# Altium PCB main_board.PcbDoc
Units mm, origin at the board's own origin, x right, y up, seen from the top; angles counter-clockwise.
Board outline 100.1 x 119.9 mm, 2 copper layers (Top Layer, Top, Bottom Layer, Bottom); 70 components, 122 nets, 500 pads, 0 vias.
Unrouted connection lines stored in the file: 189.
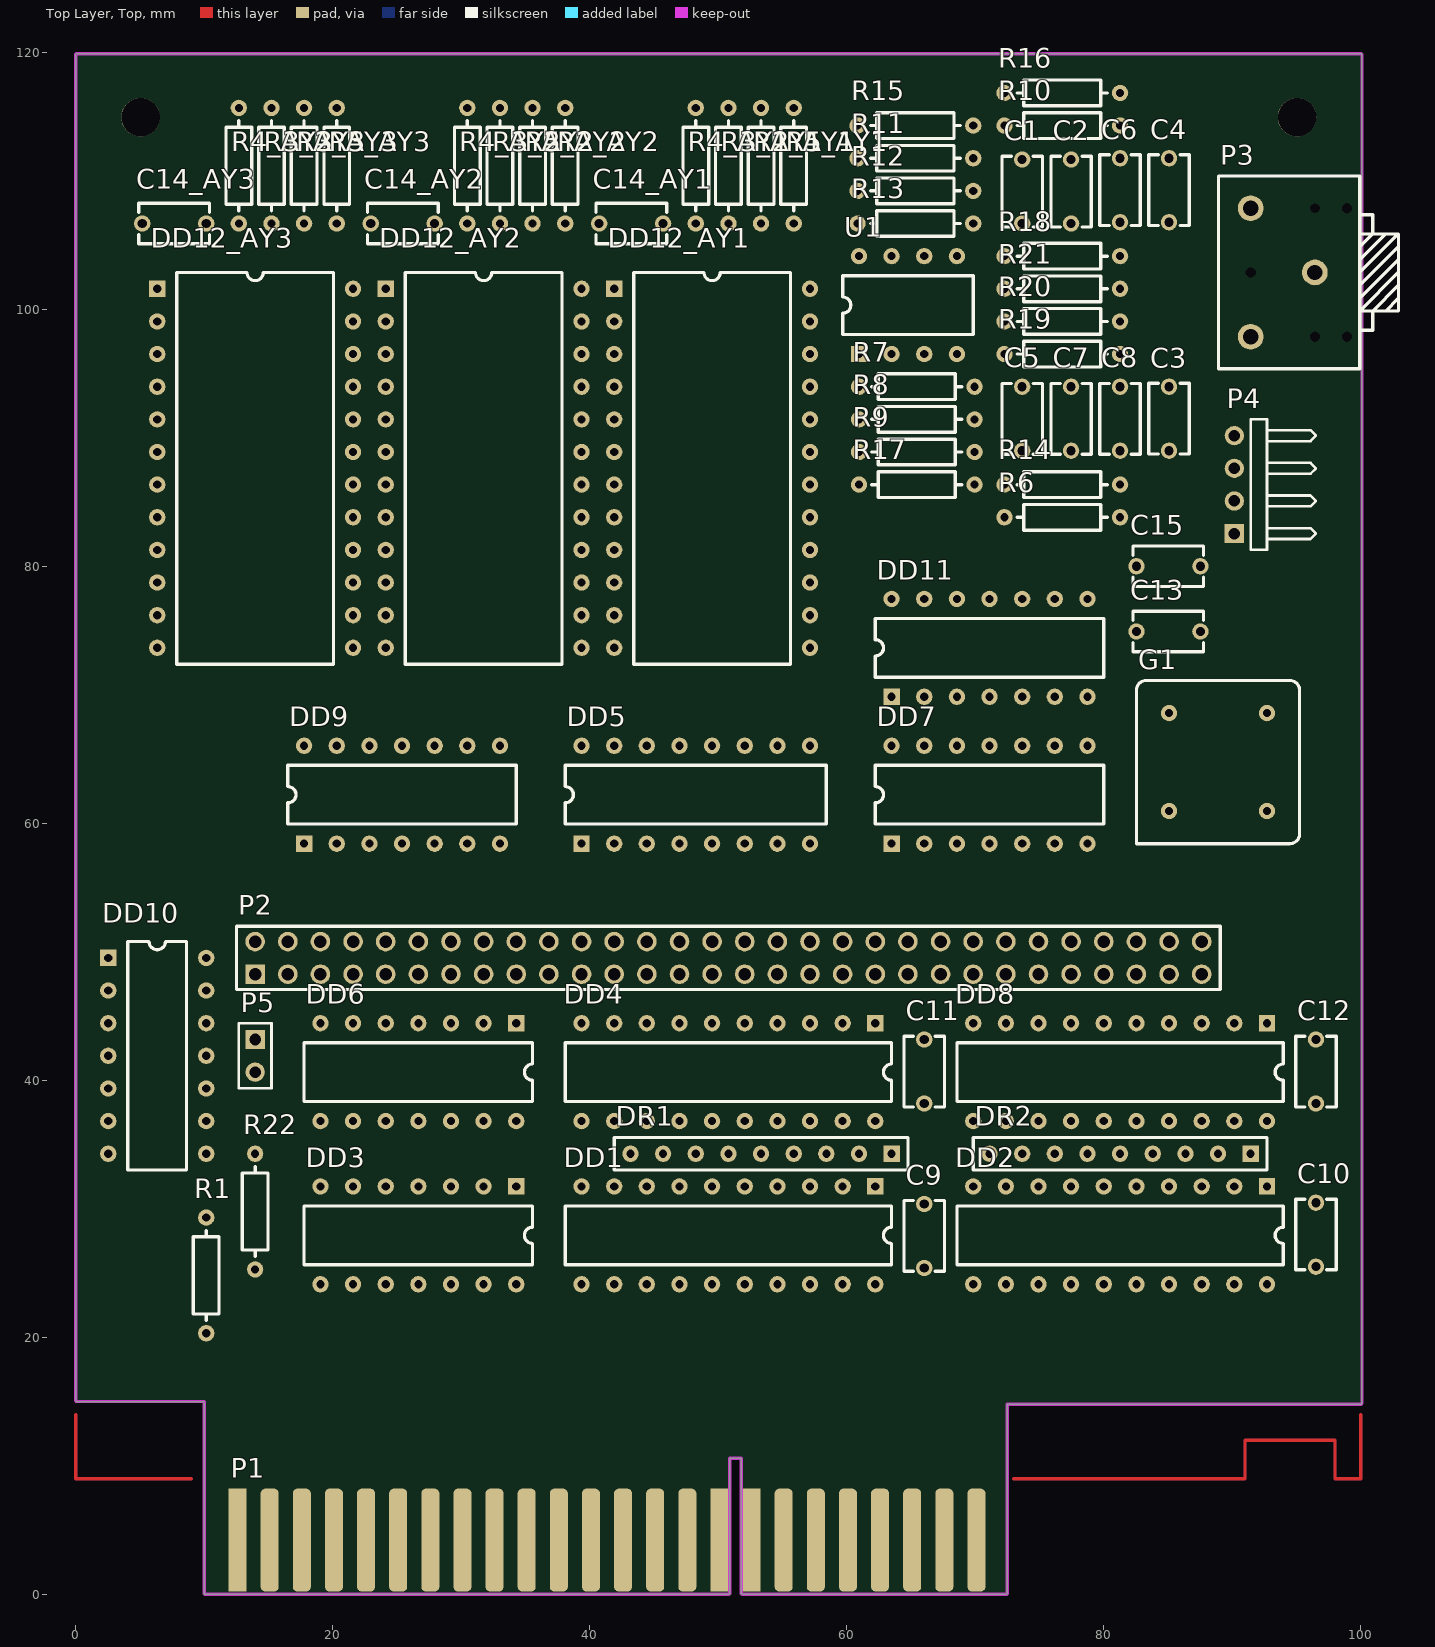
[diagram p0: Top Layer, Top view]
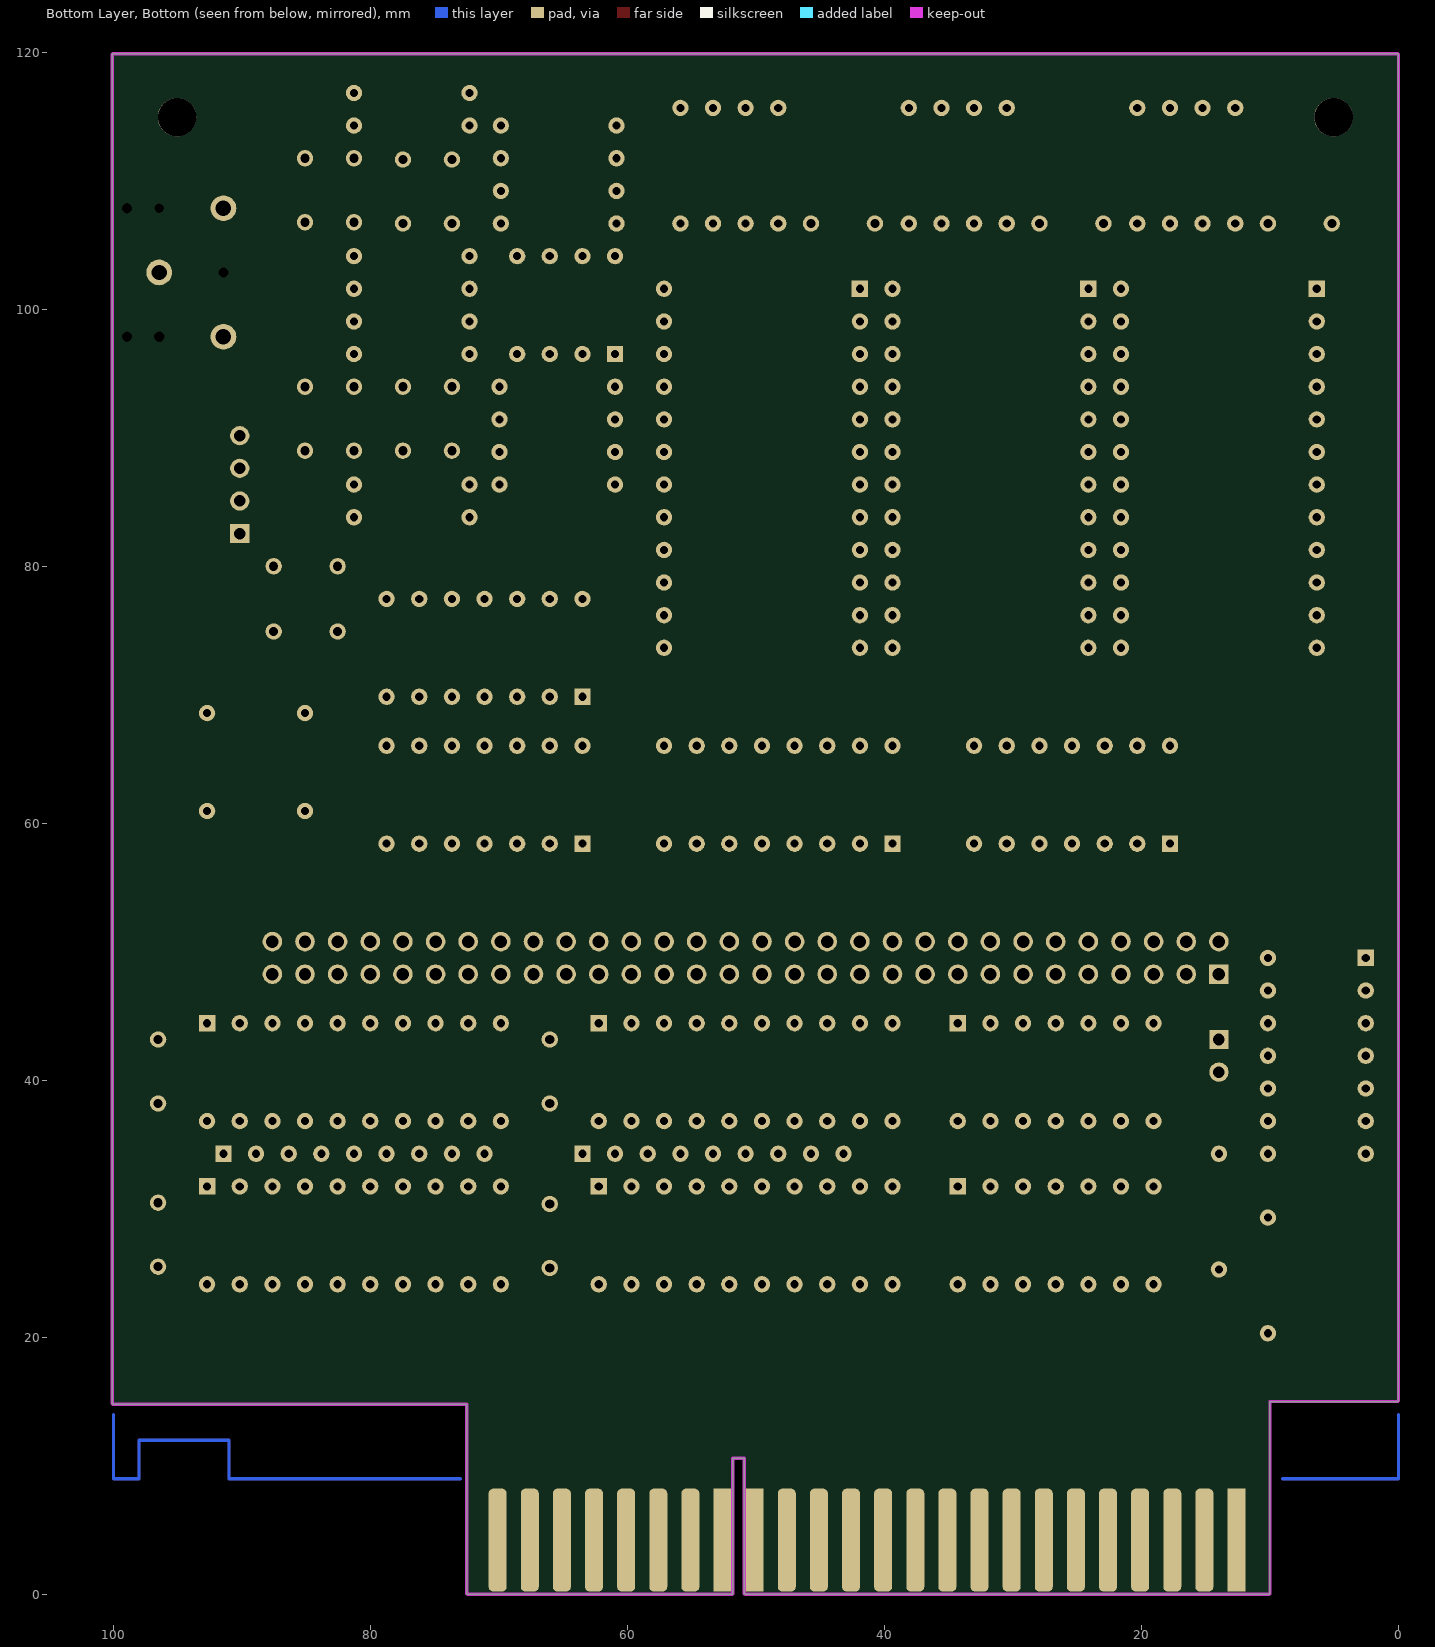
[diagram p1: Bottom Layer, Bottom view, seen from below]

## Layer stack, top to bottom
Top Solder, Top Mask: solder mask 0.0102, Solder Resist, Dk 3.5
Top Layer, Top: signal copper 0.0356
Dielectric 1: dielectric 0.32, FR-4, Dk 4.8
Bottom Layer, Bottom: signal copper 0.0356
Bottom Solder, Bot Mask: solder mask 0.0102, Solder Resist, Dk 3.5

## Board outline
0,15.05 0.05,15 10,15 10,0.05 10.05,0 50.85,0 50.9,0.05 50.9,10.6 51.8,10.6 51.8,0.05 51.85,0 72.45,0 72.5,0.05 72.5,14.8 100.05,14.8 100.1,14.85 100.1,119.85 100.05,119.9 0.05,119.9 0,119.85

## Design rules (kind name [scope] priority, off if disabled: settings)
Clearance "Clearance_Bottom Layer, Bottom" [ExistsOnLayer('Bottom Layer, Bottom') vs ExistsOnLayer('Bottom Layer, Bottom')] p1: gap=0.25 ignorepadtopadclearanceinfootprint=FALSE except(0.3: Arc-THPad Track-THPad)
Clearance [All] p2: gap=0.254 ignorepadtopadclearanceinfootprint=FALSE except(0: Arc-Hole Track-Hole SMDPad-Hole THPad-Hole Via-Hole Fill-Hole Poly-Hole Region-Hole Text-Hole; 0.25: Arc-THPad Track-THPad; 0.3: Arc-Arc Arc-Track Arc-Via Track-Track Track-Via THPad-THPad THPad-Via Via-Via)
ComponentClearance [All] p1: gap=0.127 collisioncheckmode=3 verticalgap=0.127 showdistances=FALSE
PlaneClearance [All] p1: clearance=0.254
PolygonConnect PolygonConnect_6 [IsPolygon And InNet('VDD') And OnLayer('Bottom Layer, Bottom') vs IsVia] p1: connectstyle=Direct reliefconductorwidth=0.381 reliefentries=4 polygonreliefangle="90 Angle" airgapwidth=0.254
PolygonConnect PolygonConnect_5 [IsPolygon And InNet('VDD') And OnLayer('Bottom Layer, Bottom') vs IsPad] p2: connectstyle=Direct reliefconductorwidth=0.381 reliefentries=4 polygonreliefangle="90 Angle" airgapwidth=0.254
PolygonConnect PolygonConnect_4 [IsPolygon And InNet('GND') And OnLayer('Bottom Layer, Bottom') vs IsVia] p3: connectstyle=Direct reliefconductorwidth=0.381 reliefentries=4 polygonreliefangle="90 Angle" airgapwidth=0.254
PolygonConnect PolygonConnect_3 [IsPolygon And InNet('GND') And OnLayer('Bottom Layer, Bottom') vs IsPad] p4: connectstyle=Direct reliefconductorwidth=0.381 reliefentries=4 polygonreliefangle="90 Angle" airgapwidth=0.254
PolygonConnect PolygonConnect_2 [IsPolygon And InNet('GND') And OnLayer('Top Layer, Top') vs IsVia] p5: connectstyle=Direct reliefconductorwidth=0.381 reliefentries=4 polygonreliefangle="90 Angle" airgapwidth=0.254
PolygonConnect PolygonConnect_1 [IsPolygon And InNet('GND') And OnLayer('Top Layer, Top') vs IsPad] p6: connectstyle=Direct reliefconductorwidth=0.381 reliefentries=4 polygonreliefangle="90 Angle" airgapwidth=0.254
PolygonConnect [All] p7: connectstyle=Relief reliefconductorwidth=0.254 reliefentries=4 polygonreliefangle="90 Angle" airgapwidth=0.254
RoutingVias [All] p1: holewidth=0.711 width=1.27 viastyle="Through Hole" minholewidth=0.711 minwidth=1.27 maxholewidth=0.711 maxwidth=1.27
SolderMaskExpansion [All] p1: expansion=0.102
Width [All] p1: maxlimit=0.254 minlimit=0.254 preferedwidth=0.254
28 further rules are at their usual default settings.

## Classes and differential pairs
channel class ay: AY1 AY2 AY3
net class R_IN[1..3]: R_IN3
net class L_IN[1..3]: L_IN3
net class C\S\_\A\Y\[1..3]: C\S\_\A\Y\1 C\S\_\A\Y\2 C\S\_\A\Y\3
net class C\S\[1..5]: C\S\1 C\S\2 C\S\3 C\S\4 C\S\5
net class C\E\[0..3]: C\E\0 C\E\1 C\E\2 C\E\3
net class AD[0..15]: AD0 AD1 AD2 AD3 AD4 AD5 AD6 AD7 AD8 AD9 AD10 AD11 AD12 AD13 AD14 AD15
net class A[0..12]: A0 A1 A2 A3 A4 A5 A6 A7 A8 A9 A10 A11 A12
component class Oscillator: C13 DD11 G1
component class "Future Connector": P2
component class AY3: C14_AY3 DD12_AY3 R2_AY3 R3_AY3 R4_AY3 R5_AY3
component class AY2: C14_AY2 DD12_AY2 R2_AY2 R3_AY2 R4_AY2 R5_AY2
component class AY1: C14_AY1 DD12_AY1 R2_AY1 R3_AY1 R4_AY1 R5_AY1
component class "Address Detector": C11 C12 DD4 DD5 DD6 DD7 DD8 DD9 DD10 P5 R1 R22
component class "System Bus": C9 C10 DD1 DD2 DD3 DD? DR1 DR2 P1
component class "Audio Mixer": C1 C2 C3 C4 C5 C6 C7 C8 C15 DD12 P3 P4 R6 R7 R8 R9 R10 R11 R12 R13 R14 R15 R16 R17 R18 R19 R20 R21 U1

## Components (designator, comment, footprint, x,y, rotation, side; value= is the part's Value field where it differs from the comment)
C1 "10u" "CAP 5.5x3.15" 73.66,111.658 r270 top
C2 "10u" "CAP 5.5x3.15" 77.47,111.658 r270 top
C3 "10u" "CAP 5.5x3.15" 85.09,89.002 r90 top
C4 "10u" "CAP 5.5x3.15" 85.09,106.782 r90 top
C5 "10u" "CAP 5.5x3.15" 73.66,93.98 r270 top
C6 "10u" "CAP 5.5x3.15" 81.28,106.782 r90 top
C7 "10u" "CAP 5.5x3.15" 77.47,93.98 r270 top
C8 "10u" "CAP 5.5x3.15" 81.28,93.98 r270 top
C9 "10u" "CAP 5.5x3.15" 66.04,25.4 r90 top
C10 "10u" "CAP 5.5x3.15" 96.52,25.502 r90 top
C11 "10u" "CAP 5.5x3.15" 66.04,43.18 r270 top
C12 "10u" "CAP 5.5x3.15" 96.52,43.18 r270 top
C13 "10u" "CAP 5.5x3.15" 87.528,74.93 r180 top
C14_AY1 "10u" "CAP 5.5x3.15" 40.742,106.68 r0 top (schematic designator C14)
C14_AY2 "10u" "CAP 5.5x3.15" 22.962,106.68 r0 top (schematic designator C14)
C14_AY3 "10u" "CAP 5.5x3.15" 10.16,106.68 r180 top (schematic designator C14)
C15 "10u" "CAP 5.5x3.15" 87.528,80.01 r180 top
DD1 "74F642N" DIP20 62.23,31.75 r270 top
DD2 "74F642N" DIP20 92.71,31.75 r270 top
DD3 "74x1034" DIP14 34.29,31.75 r270 top
DD4 "74x573" DIP20 62.23,44.45 r270 top
DD5 "74x138" DIP16 39.37,58.42 r90 top
DD6 "74x27" DIP14 34.29,44.45 r270 top
DD7 "74x30" DIP14 63.5,58.42 r90 top
DD8 "74x573" DIP20 92.71,44.45 r270 top
DD9 "74x08" DIP14 17.78,58.42 r90 top
DD10 "74x38" DIP14 2.54,49.53 r0 top
DD11 "74x93A" DIP14 63.5,69.85 r90 top
DD12_AY1 "AY-3-8913" DIP24 41.91,101.6 r0 top (schematic designator DD12)
DD12_AY2 "AY-3-8913" DIP24 24.13,101.6 r0 top (schematic designator DD12)
DD12_AY3 "AY-3-8913" DIP24 6.35,101.6 r0 top (schematic designator DD12)
DR1 "RNA8" SIP9 63.5,34.29 r270 top
DR2 "RNA8" SIP9 91.44,34.29 r270 top
G1 "CXO" "DIP8 CXO" 82.55,58.42 r90 top
P1 "EDGE" "SNP15-48 EDGE" 12.6,4.225 r0 top locked
P2 "PLD60" PLD60 50.8,49.53 r180 top locked
P3 "3.5mm audio socket" ST-111 96.44,102.87 r180 top
P4 "Header 4H" HDR1X4H 90.17,82.55 r90 top
P5 "Header 2" HDR1X2 13.97,43.18 r270 top
R1 "2.2K" "Axial Res 0.25" 10.16,29.32 r270 top
R2_AY1 "1K" "Axial Res 0.25" 53.34,106.68 r90 top (schematic designator R2)
R2_AY2 "1K" "Axial Res 0.25" 38.1,106.68 r90 top (schematic designator R2)
R2_AY3 "1K" "Axial Res 0.25" 17.78,106.68 r90 top (schematic designator R2)
R3_AY1 "2.2K" "Axial Res 0.25" 50.8,106.68 r90 top (schematic designator R3)
R3_AY2 "2.2K" "Axial Res 0.25" 33.02,106.68 r90 top (schematic designator R3)
R3_AY3 "2.2K" "Axial Res 0.25" 15.24,106.68 r90 top (schematic designator R3)
R4_AY1 "2.2K" "Axial Res 0.25" 48.26,106.68 r90 top (schematic designator R4)
R4_AY2 "2.2K" "Axial Res 0.25" 30.48,106.68 r90 top (schematic designator R4)
R4_AY3 "2.2K" "Axial Res 0.25" 12.7,106.68 r90 top (schematic designator R4)
R5_AY1 "1K" "Axial Res 0.25" 55.88,106.68 r90 top (schematic designator R5)
R5_AY2 "1K" "Axial Res 0.25" 35.56,106.68 r90 top (schematic designator R5)
R5_AY3 "1K" "Axial Res 0.25" 20.32,106.68 r90 top (schematic designator R5)
R6 "24k" "Axial Res 0.25" 81.28,83.82 r180 top
R7 "24k" "Axial Res 0.25" 69.96,93.98 r180 top
R8 "10k" "Axial Res 0.25" 69.96,91.44 r180 top
R9 "510" "Axial Res 0.25" 69.96,88.9 r180 top
R10 "10k" "Axial Res 0.25" 81.28,114.3 r180 top
R11 "24k" "Axial Res 0.25" 69.85,111.76 r180 top
R12 "10k" "Axial Res 0.25" 69.85,109.22 r180 top
R13 "510" "Axial Res 0.25" 69.85,106.68 r180 top
R14 "24k" "Axial Res 0.25" 81.28,86.36 r180 top
R15 "47k" "Axial Res 0.25" 69.85,114.3 r180 top
R16 "10k" "Axial Res 0.25" 81.28,116.84 r180 top
R17 "47k" "Axial Res 0.25" 69.96,86.36 r180 top
R18 "10k" "Axial Res 0.25" 81.28,104.14 r180 top
R19 "24k" "Axial Res 0.25" 81.28,96.52 r180 top
R20 "510" "Axial Res 0.25" 81.28,99.06 r180 top
R21 "24k" "Axial Res 0.25" 81.28,101.6 r180 top
R22 "2.2K" "Axial Res 0.25" 13.97,25.29 r90 top
U1 "LM358N" DIP8 60.96,96.52 r90 top

## Footprints (in the part's own frame and the unit in brackets; to place one, negate y for a bottom-side part, rotate by r counter-clockwise, add the part's x,y. Pads: shape width x height; smd on the part's side, far side on the other; paste and mask are expansions set on the pad)
"Axial Res 0.25" [mm]
  round 1.27 hole 0.635: ""(0,0) ""(9,0)
  silkscreen extent 1,-1 8,1, body extent -0.19,-1.19 9.21,1.19, height 2.57
"CAP 5.5x3.15" [mil]
  round 50 hole 28: 1(0,0) 2(196,0)
  silkscreen extent -10,-62 207,62
DIP8 [mm]
  rect 1.27x1.27 hole 0.635: 1(0,0)
  round 1.27 hole 0.635: 2(0,-2.54) 3(0,-5.08) 4(0,-7.62) 5(7.62,-7.62) 6(7.62,-5.08) 7(7.62,-2.54) 8(7.62,0)
  silkscreen extent 1.52,-8.89 6.1,1.27, body extent -0.12,-8.41 7.75,0.79, height 3.85
"DIP8 CXO" [mm]
  round 1.27 hole 0.635: 1(2.54,-2.54) 4(10.16,-2.54) 5(10.16,-10.16) 8(2.54,-10.16)
  silkscreen extent 0,-12.7 12.7,0, body extent 0,-12.7 12.7,0, height 4.6
DIP14 [mm]
  rect 1.27x1.27 hole 0.635: 1(0,0)
  round 1.27 hole 0.635: 2(0,-2.54) 3(0,-5.08) 4(0,-7.62) 5(0,-10.16) 6(0,-12.7) 7(0,-15.24) 8(7.62,-15.24) 9(7.62,-12.7) 10(7.62,-10.16) 11(7.62,-7.62) 12(7.62,-5.08) 13(7.62,-2.54) 14(7.62,0)
  silkscreen extent 1.52,-16.51 6.1,1.27, body extent 0,-17.22 7.62,1.98, height 4
DIP16 [mm]
  rect 1.27x1.27 hole 0.635: 1(0,0)
  round 1.27 hole 0.635: 2(0,-2.54) 3(0,-5.08) 4(0,-7.62) 5(0,-10.16) 6(0,-12.7) 7(0,-15.24) 8(0,-17.78) 9(7.62,-17.78) 10(7.62,-15.24) 11(7.62,-12.7) 12(7.62,-10.16) 13(7.62,-7.62) 14(7.62,-5.08) 15(7.62,-2.54) 16(7.62,0)
  silkscreen extent 1.52,-19.05 6.1,1.27, body extent -0.13,-18.92 7.75,1.14, height 5.33
DIP20 [mm]
  rect 1.27x1.27 hole 0.635: 1(0,0)
  round 1.27 hole 0.635: 2(0,-2.54) 3(0,-5.08) 4(0,-7.62) 5(0,-10.16) 6(0,-12.7) 7(0,-15.24) 8(0,-17.78) 9(0,-20.32) 10(0,-22.86) 11(7.62,-22.86) 12(7.62,-20.32) 13(7.62,-17.78) 14(7.62,-15.24) 15(7.62,-12.7) 16(7.62,-10.16) 17(7.62,-7.62) 18(7.62,-5.08) 19(7.62,-2.54) 20(7.62,0)
  silkscreen extent 1.52,-24.13 6.1,1.27, body extent -0.13,-24.51 7.75,1.65, height 5.33
DIP24 [mm]
  rect 1.27x1.27 hole 0.635: 1(0,0)
  round 1.27 hole 0.635: 2(0,-2.54) 3(0,-5.08) 4(0,-7.62) 5(0,-10.16) 6(0,-12.7) 7(0,-15.24) 8(0,-17.78) 9(0,-20.32) 10(0,-22.86) 11(0,-25.4) 12(0,-27.94) 13(15.24,-27.94) 14(15.24,-25.4) 15(15.24,-22.86) 16(15.24,-20.32) 17(15.24,-17.78) 18(15.24,-15.24) 19(15.24,-12.7) 20(15.24,-10.16) 21(15.24,-7.62) 22(15.24,-5.08) 23(15.24,-2.54) 24(15.24,0)
  silkscreen extent 1.52,-29.21 13.72,1.27, body extent -0.13,-30.1 15.37,2.16, height 5.08
HDR1X2 [mm] "Connector; Header; 2 Position"
  rect 1.5x1.5 hole 0.9: 1(0,0)
  round 1.5 hole 0.9: 2(2.54,0)
  silkscreen extent -1.27,-1.27 3.81,1.27
HDR1X4H [mm] "Connector; Header; 4 Position; Right Angle"
  rect 1.5x1.5 hole 0.9: 1(0,0)
  round 1.5 hole 0.9: 2(2.54,0) 3(5.08,0) 4(7.62,0)
  silkscreen extent -1.27,-6.35 8.89,-1.27
PLD60 [mil]
  rect 60x60 hole 38: 1(1450,50)
  round 60 hole 38: 2(1450,-50) 3(1350,50) 4(1350,-50) 5(1250,50) 6(1250,-50) 7(1150,50) 8(1150,-50) 9(1050,50) 10(1050,-50) 11(950,50) 12(950,-50) 13(850,50) 14(850,-50) 15(750,50) 16(750,-50) 17(650,50) 18(650,-50) 19(550,50) 20(550,-50) 21(450,50) 22(450,-50) 23(350,50) 24(350,-50) 25(250,50) 26(250,-50) 27(150,50) 28(150,-50) 29(50,50) 30(50,-50) 31(-50,50) 32(-50,-50) 33(-150,50) 34(-150,-50) 35(-250,50) 36(-250,-50) 37(-350,50) 38(-350,-50) 39(-450,50) 40(-450,-50) 41(-550,50) 42(-550,-50) 43(-650,50) 44(-650,-50) 45(-750,50) 46(-750,-50) 47(-850,50) 48(-850,-50) 49(-950,50) 50(-950,-50) 51(-1050,50) 52(-1050,-50) 53(-1150,50) 54(-1150,-50) 55(-1250,50) 56(-1250,-50) 57(-1350,50) 58(-1350,-50) 59(-1450,50) 60(-1450,-50)
  silkscreen extent -1507,-97 1507,97, body extent -1500,-100 1500,100, height 339
SIP9 [mm]
  rect 1.27x1.27 hole 0.635: 1(0,0)
  round 1.27 hole 0.635: 2(0,-2.54) 3(0,-5.08) 4(0,-7.62) 5(0,-10.16) 6(0,-12.7) 7(0,-15.24) 8(0,-17.78) 9(0,-20.32)
  silkscreen extent -1.27,-21.59 1.27,1.27, body extent -1.25,-21.61 1.25,1.29, height 6.08
"SNP15-48 EDGE" [mm]
  rect 1.4x8 smd far side: A1(0,0) A16(37.5,0) A17(40,0)
  rrect50% 1.4x8 smd far side: A2(2.5,0) A3(5,0) A4(7.5,0) A5(10,0) A6(12.5,0) A7(15,0) A8(17.5,0) A9(20,0) A10(22.5,0) A11(25,0) A12(27.5,0) A13(30,0) A14(32.5,0) A15(35,0) A18(42.5,0) A19(45,0) A20(47.5,0) A21(50,0) A22(52.5,0) A23(55,0) A24(57.5,0)
  rect 1.4x8 smd: B1(0,0) B16(37.5,0) B17(40,0)
  rrect50% 1.4x8 smd: B2(2.5,0) B3(5,0) B4(7.5,0) B5(10,0) B6(12.5,0) B7(15,0) B8(17.5,0) B9(20,0) B10(22.5,0) B11(25,0) B12(27.5,0) B13(30,0) B14(32.5,0) B15(35,0) B18(42.5,0) B19(45,0) B20(47.5,0) B21(50,0) B22(52.5,0) B23(55,0) B24(57.5,0)
ST-111 [mm]
  round 0 hole 0.762 unplated: 0(0,-5)
  round 2 hole 1.2: 1(0,0) 2(5,5) 3(5,-5)
  round 0 hole 0.8 unplated: ""(-2.5,5) ""(-2.5,-5) ""(0,5) ""(5,0)
  silkscreen extent -6.5,-7.5 7.5,7.5

## Part data
C1 C2 C3 C4 C5 C6 C7 C8 C9 C10 C11 C12 C13 C14_AY1 C14_AY2 C14_AY3 C15: library part Cap, "Murata ceramic capacitor"
DD1 DD2: library part 74x642
DD3: library part "74x1034 IEEE", "ЛП19 6 buffers"
DD4 DD8: "ИР22 transparent latch"
DD5: "ИД7 3 to 8 DEMUX"
DD6: "ЛЕ4 3x3NOR"
DD7: "ЛА2 8NAND"
DD9: "ЛИ1 4x2AND"
DD10: "ЛА13 4x2NAND O.C."
DD11: library part "74x93A IEEE", "ИЕ5"
G1: Frequency=14.31818MHz
P1: library part "SNP15-48 EDGE"
P4: "Header, 4-Pin, Right Angle", LatestRevisionDate=17-Jul-2002, LatestRevisionNote="Re-released for DXP Platform.", Publisher="Altium Limited"
P5: "Header, 2-Pin", LatestRevisionDate=17-Jul-2002, LatestRevisionNote="Re-released for DXP Platform.", Publisher="Altium Limited"
R1 R2_AY1 R2_AY2 R2_AY3 R3_AY1 R3_AY2 R3_AY3 R4_AY1 R4_AY2 R4_AY3 R5_AY1 R5_AY2 R5_AY3 R6 R7 R8 R9 R10 R11 R12 R13 R14 R15 R16 R17 R18 R19 R20 R21 R22: library part "Axial Resistor 0.25"

## Free pads (board coordinates)
  round 3 hole 3 unplated: 0(5.05,114.95) 0(95.05,114.95)

## Nets (pads, with @x,y where several pads share a name; then routed paths per layer and width w, separated by ;. In a path a pad name is that pad's centre, name@x,y a point inside that pad or via, vN(x,y) a via of type N, cw(c..) or ccw(c..) an arc to the next point about the centre after c; other vN are vias at no path point)
3.58MHz: DD11.8 P2.7
4MHz: DD3.8 P2.8
+5: C9.2 C10.2 C11.2 C12.2 C13.2 C14_AY1.2 C14_AY2.2 C14_AY3.2 C15.2 DD1.20 DD2.20 DD3.14 DD4.20 DD5.16 DD6.14 DD7.14 DD8.20 DD9.14 DD10.14 DD11.5 DD12_AY1.13 DD12_AY1.23 DD12_AY2.13 DD12_AY2.23 DD12_AY3.13 DD12_AY3.23 DR1.1 DR2.1 P1.A1 P1.A24 P2.1 P2.2 R1. R10. U1.8
A0: DD4.19 P2.39
A1: DD4.18 DD5.1 P2.37
A2: DD4.17 DD5.2 P2.35
A3: DD4.16 DD5.3 P2.33
A4: DD4.15 DD7.1 P2.31
A5: DD4.14 DD6.2 P2.29
A6: DD4.13 DD7.2 P2.27
A7: DD4.12 DD7.3 P2.25
A8: DD7.4 DD8.19 P2.55
A9: DD7.5 DD8.18 P2.53
A10: DD7.6 DD8.17 P2.51
A11: DD7.11 DD8.16 P2.49
A12: DD7.12 DD8.15 P2.47
A\1\6\: DD8.9 P1.A3
A\1\6\'\: DD8.12 P2.41
A\D\0\: DD1.18 P1.B21
A\D\1\: DD1.17 P1.A21
A\D\1\0\: DD2.16 P1.B19
A\D\1\1\: DD2.15 P1.A19
A\D\1\2\: DD2.14 P1.B22
A\D\1\3\: DD2.13 P1.A22
A\D\1\4\: DD2.12 P1.B23
A\D\1\5\: DD2.11 P1.A2
A\D\2\: DD1.16 P1.B20
A\D\3\: DD1.15 P1.A20
A\D\4\: DD1.14 P1.B16
A\D\5\: DD1.13 P1.A16
A\D\6\: DD1.12 P1.B17
A\D\7\: DD1.11 P1.A17
A\D\8\: DD2.18 P1.B18
A\D\9\: DD2.17 P1.A18
AD0: DD1.2 DD4.2 DD12_AY1.11 DD12_AY2.11 DD12_AY3.11 DR1.2 P2.40
AD1: DD1.3 DD4.3 DD12_AY1.10 DD12_AY2.10 DD12_AY3.10 DR1.3 P2.38
AD2: DD1.4 DD4.4 DD12_AY1.9 DD12_AY2.9 DD12_AY3.9 DR1.4 P2.36
AD3: DD1.5 DD4.5 DD12_AY1.8 DD12_AY2.8 DD12_AY3.8 DR1.5 P2.34
AD4: DD1.6 DD4.6 DD12_AY1.7 DD12_AY2.7 DD12_AY3.7 DR1.6 P2.32
AD5: DD1.7 DD4.7 DD12_AY1.6 DD12_AY2.6 DD12_AY3.6 DR1.7 P2.30
AD6: DD1.8 DD4.8 DD12_AY1.5 DD12_AY2.5 DD12_AY3.5 DR1.8 P2.28
AD7: DD1.9 DD4.9 DD12_AY1.4 DD12_AY2.4 DD12_AY3.4 DR1.9 P2.26
AD8: DD2.2 DD8.2 DR2.2 P2.56
AD9: DD2.3 DD8.3 DR2.3 P2.54
AD10: DD2.4 DD8.4 DR2.4 P2.52
AD11: DD2.5 DD8.5 DR2.5 P2.50
AD12: DD2.6 DD8.6 DR2.6 P2.48
AD13: DD2.7 DR2.7 P2.46
AD14: DD2.8 DR2.8 P2.44
AD15: DD2.9 DR2.9 P2.42
B\S\7\: DD8.8 P1.A6
B\S\7\'\: DD6.13 DD8.13 P2.43
Beeper: P1.B5
C\E\0: P1.B12 P2.4
C\E\1: P1.B14 P2.3
C\E\2: P1.B13 P2.6
C\E\3: P1.A12 P2.5
C\S\1: DD5.12 P2.22
C\S\2: DD5.11 P2.19
C\S\3: DD5.10 P2.20
C\S\4: DD5.9 P2.17
C\S\5: DD5.7 P2.18
C\S\_\A\Y\1: DD5.15 DD12_AY1.24
C\S\_\A\Y\2: DD5.14 DD12_AY2.24
C\S\_\A\Y\3: DD5.13 DD12_AY3.24
D\I\N\: DD3.2 DD6.3 DD6.4 DD6.5 DD9.4 DD10.2 P2.21
D\O\U\T\: DD3.4 DD10.1 P2.24
e4MHz: DD3.9 P1.A4
eD\I\N\: DD3.1 P1.A14
eD\O\U\T\: DD3.3 P1.B8
eI\N\I\T\: DD3.13 P1.B10
eS\Y\N\C\: DD3.11 P1.A15
eW\T\B\T\: DD3.5 P1.A8
G3: DD6.10 DD6.11 P2.15 P5.1
GND: C5.1 C9.1 C10.1 C11.1 C12.1 C13.1 C14_AY1.1 C14_AY2.1 C14_AY3.1 C15.1 DD1.10 DD1.19 DD2.10 DD2.19 DD3.7 DD4.1 DD4.10 DD5.4 DD5.5 DD5.8 DD6.7 DD7.7 DD8.1 DD8.10 DD9.7 DD9.9 DD9.10 DD10.7 DD10.12 DD10.13 DD11.2 DD11.3 DD11.10 DD11.14 DD12_AY1.1 DD12_AY1.19 DD12_AY1.22 DD12_AY2.1 DD12_AY2.19 DD12_AY2.22 DD12_AY3.1 DD12_AY3.19 DD12_AY3.22 P1.B1 P1.B24 P2.57 P2.58 P2.59 P2.60 P3.1 P4.2 P4.3 P5.2 R9. R13. R18. U1.4
I\N\I\T\: DD3.12 DD12_AY1.21 DD12_AY2.21 DD12_AY3.21 P2.16
L_IN3: C2.1
NetC1_1: C1.1 R8. U1.1
NetC1_2: C1.2 P3.3
NetC2_2: C2.2 R7.
NetC3_1: C3.1 P4.4 R15.
NetC3_2: C3.2 R14.
NetC4_1: C4.1 R16. R20.
NetC4_2: C4.2 R6. R21.
NetC5_2: C5.2 U1.3 U1.5
NetC6_1: C6.1 P4.1 R17.
NetC6_2: C6.2 R19.
NetC7_1: C7.1 R12. U1.7
NetC7_2: C7.2 P3.2
NetC8_2: C8.2 R11.
NetDD5_6: DD5.6 DD6.9 DD6.12
NetDD6_1: DD6.1 DD7.8
NetDD6_6: DD6.6 DD9.13
NetDD6_8: DD6.8 DD10.9 DD10.10
NetDD9_1: DD9.1 DD9.5 DD10.3 DD10.4
NetDD9_3: DD9.3 DD12_AY1.3 DD12_AY2.3 DD12_AY3.3
NetDD9_6: DD9.6 DD12_AY1.2 DD12_AY2.2 DD12_AY3.2
NetDD9_12: DD9.12 DD10.5 DD10.8 R22.
NetDD11_1: DD11.1 G1.5
NetDD11_11: DD11.11 DD12_AY1.20 DD12_AY2.20 DD12_AY3.20
NetDD12_AY1_15: DD12_AY1.15 R4_AY1.
NetDD12_AY1_17: DD12_AY1.17
NetDD12_AY1_18: DD12_AY1.18 R5_AY1.
NetDD12_AY2_15: DD12_AY2.15
NetDD12_AY2_17: DD12_AY2.17
NetDD12_AY2_18: DD12_AY2.18
NetDD12_AY3_15: DD12_AY3.15
NetDD12_AY3_17: DD12_AY3.17
NetDD12_AY3_18: DD12_AY3.18
NetR2_AY1: R2_AY1. R3_AY1.
NetR2_AY2: R2_AY2. R3_AY2.
NetR2_AY3: R2_AY3. R3_AY3.
NetR4_AY1: 
NetR4_AY2: R4_AY2. R5_AY2.
NetR4_AY3: R4_AY3. R5_AY3.
NetR6: U1.2
NetR11: U1.6
R\P\L\Y\: DD10.6 P1.B15
R_IN3: C8.1
S\Y\N\C\: DD3.10 DD4.11 DD8.11
T/R\: DD1.1 DD2.1 DD9.11
W\T\B\T\: DD3.6 DD9.2 P2.23
pads on no net: DD7.9 DD7.10 DD7.13 DD8.7 DD8.14 DD9.8 DD10.11 DD11.4 DD11.6 DD11.7 DD11.9 DD11.12 DD11.13 DD12_AY1.12 DD12_AY1.14 DD12_AY1.16 DD12_AY2.12 DD12_AY2.14 DD12_AY2.16 DD12_AY3.12 DD12_AY3.14 DD12_AY3.16 G1.1 G1.4 G1.8 P1.A5 P1.A7 P1.A9 P1.A10 P1.A11 P1.A13 P1.A23 P1.B2 P1.B3 P1.B4 P1.B6 P1.B7 P1.B9 P1.B11 P2.9 P2.10 P2.11 P2.12 P2.13 P2.14 P2.45 P3. P3.0

## Keep-outs
Keep-Out Layer, Board:
  lines w0.1: 50.85,10.65 50.85,0.05 43.85,0.05 10.05,0.05 10.05,15.05 0.05,15.05 0.05,119.85 100.05,119.85 100.05,14.85 72.45,14.85 72.45,0.05 51.85,0.05 51.85,10.65
  lines w0.254: 0,15.05 0,119.85 ; 0,15.05 0.05,15 ; 0,15.05 0,119.85 ; 0,15.05 0.05,15 ; 0,119.85 0.05,119.9 ; 0,119.85 0.05,119.9 ; 0.05,15 10,15 ; 0.05,15 10,15 ; 0.05,119.9 100.05,119.9 ; 0.05,119.9 100.05,119.9 ; 10,0.05 10.05,0 ; 10,0.05 10,15 ; 10,0.05 10.05,0 ; 10,0.05 10,15 ; 10.05,0 50.85,0 ; 10.05,0 50.85,0 ; 50.85,0 50.9,0.05 ; 50.85,0 50.9,0.05 ; 50.9,0.05 50.9,10.6 ; 50.9,0.05 50.9,10.6 ; 50.9,10.6 51.8,10.6 ; 50.9,10.6 51.8,10.6 ; 51.8,0.05 51.85,0 ; 51.8,0.05 51.8,10.6 ; 51.8,0.05 51.85,0 ; 51.8,0.05 51.8,10.6 ; 51.85,0 72.45,0 ; 51.85,0 72.45,0 ; 72.45,0 72.5,0.05 ; 72.45,0 72.5,0.05 ; 72.5,0.05 72.5,14.8 ; 72.5,0.05 72.5,14.8 ; 72.5,14.8 100.05,14.8 ; 72.5,14.8 100.05,14.8 ; 100.05,14.8 100.1,14.85 ; 100.05,14.8 100.1,14.85 ; 100.05,119.9 100.1,119.85 ; 100.05,119.9 100.1,119.85 ; 100.1,14.85 100.1,119.85 ; 100.1,14.85 100.1,119.85

## Other copper
Multi-Layer:
  lines w0.254: 0,14 0,9 9,9 ; 73,9 91,9 91,12 98,12 98,9 100,9 100,14